# EAGLE board mynsys (EAGLE 9.6.2)
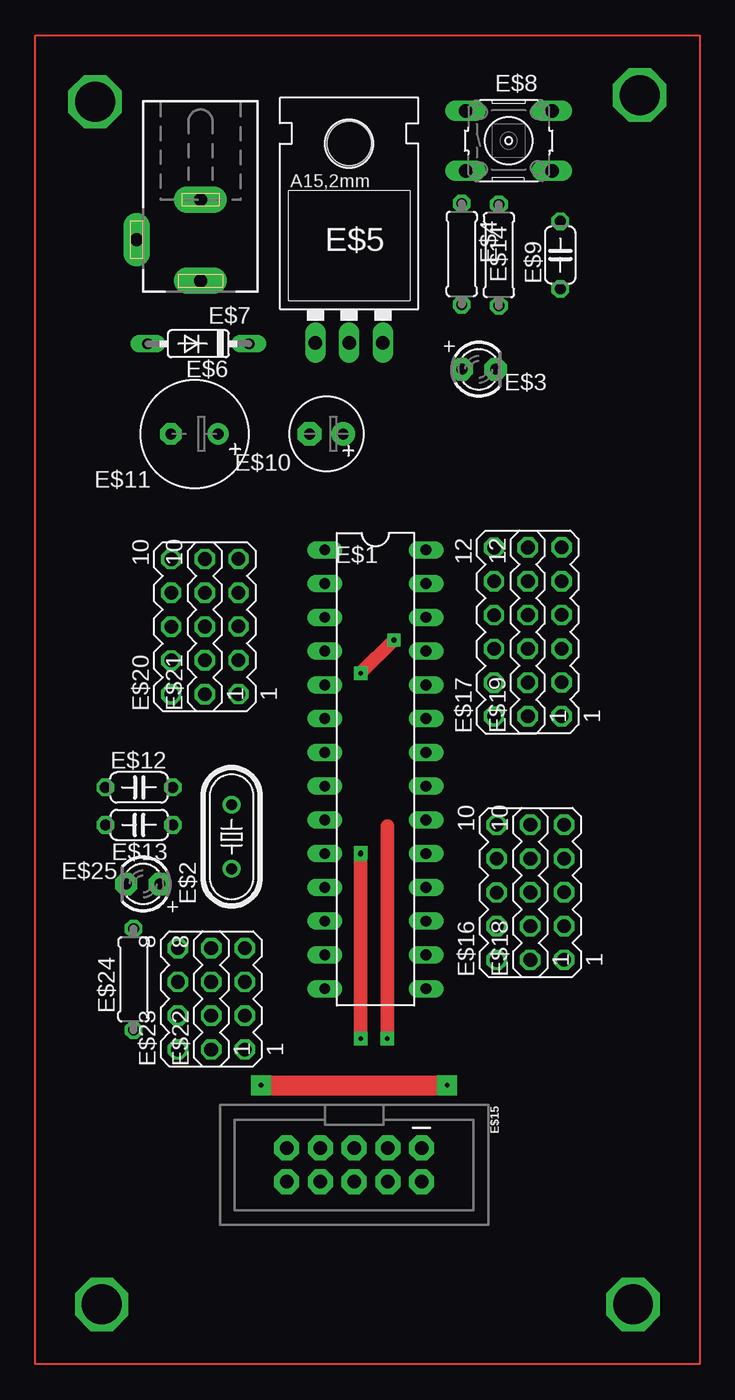
[diagram p0: board, top side]
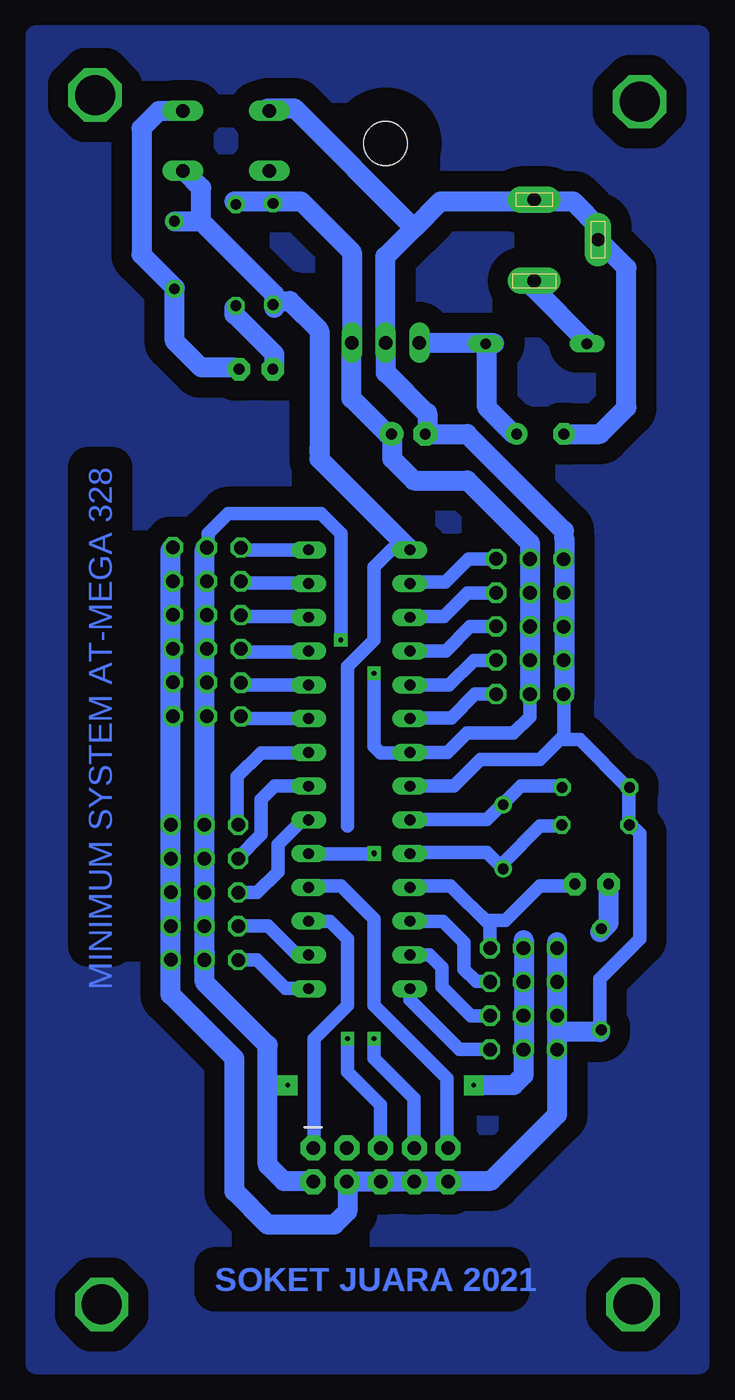
[diagram p1: board, bottom side, seen from below]

No outline drawn. Coordinates in mm, seen from the top.
Copper layers (1*16): Top 0.035mm / dielectric 1.5mm / Bottom 0.035mm
Design rules "default *": minimum track width 6mil, minimum drill 0.35mm, track to track 60mil, track to pad 60mil, pad to pad 6mil, via to via 6mil, smd to smd 6mil, copper to edge 40mil, drill to drill 6mil, minimum pad ring 10mil, minimum via ring 8mil, stop-mask expansion 4mil, vias tented up to drill 0mil, thermal gap 10mil

## Footprints (pad centres in the part's own frame; a part is rotated, then mirrored left to right if it is on the bottom)
DIL28-3 = drill 0.813 long: 1 -16.51,-3.81; 2 -13.97,-3.81; 3 -11.43,-3.81; 4 -8.89,-3.81; 5 -6.35,-3.81; 6 -3.81,-3.81; 7 -1.27,-3.81; 8 1.27,-3.81; 9 3.81,-3.81; 10 6.35,-3.81; 11 8.89,-3.81; 12 11.43,-3.81; 13 13.97,-3.81; 14 16.51,-3.81; 15 16.51,3.81; 16 13.97,3.81; 17 11.43,3.81; 18 8.89,3.81; 19 6.35,3.81; 20 3.81,3.81; 21 1.27,3.81; 22 -1.27,3.81; 23 -3.81,3.81; 24 -6.35,3.81; 25 -8.89,3.81; 26 -11.43,3.81; 27 -13.97,3.81; 28 -16.51,3.81
HC49/S = drill 0.813: 1 -2.413,0; 2 2.413,0
LED3MM = drill 0.813 pad 1.676 octagon: A -1.27,0; K 1.27,0
0207/7 = drill 0.813 octagon: 1 -3.81,0; 2 3.81,0
78XXL = drill 1.016 long: GND 0,-3.81; IN -2.54,-3.81; OUT 2.54,-3.81 | hole 3.302: 0,11.176
DO35-7 = drill 0.813 long: A 3.81,0; C -3.81,0
DCJ0202 = drill 1 pad 2 long: 1 0,3.1; 2 4.8,0; 3 0,-3
B3F-10XX = drill 1.016 long: 1 -3.251,2.261; 2 3.251,2.261; 3 -3.251,-2.261; 4 3.251,-2.261
C050-024X044 = drill 0.813 octagon: 1 -2.54,0; 2 2.54,0
E2,5-6 = drill 0.813 pad 1.778: + -1.27,0 | drill 0.813 pad 1.778 octagon: - 1.27,0
E3,5-8 = drill 0.813 pad 1.6: + -1.778,0 | drill 0.813 pad 1.6 octagon: - 1.778,0
2X5-SHROUDED-NS = drill 1.016 pad 1.88 octagon: 1 -1.27,5.08; 2 1.27,5.08; 3 -1.27,2.54; 4 1.27,2.54; 5 -1.27,0; 6 1.27,0; 7 -1.27,-2.54; 8 1.27,-2.54; 9 -1.27,-5.08; 10 1.27,-5.08
MA05-2 = drill 1.016 octagon: 1 -5.08,-1.27; 2 -5.08,1.27; 3 -2.54,-1.27; 4 -2.54,1.27; 5 0,-1.27; 6 0,1.27; 7 2.54,-1.27; 8 2.54,1.27; 9 5.08,-1.27; 10 5.08,1.27
MA06-2 = drill 1.016 octagon: 1 -6.35,-1.27; 2 -6.35,1.27; 3 -3.81,-1.27; 4 -3.81,1.27; 5 -1.27,-1.27; 6 -1.27,1.27; 7 1.27,-1.27; 8 1.27,1.27; 9 3.81,-1.27; 10 3.81,1.27; 11 6.35,-1.27; 12 6.35,1.27
MA04-2 = drill 1.016 octagon: 1 -3.81,-1.27; 2 -3.81,1.27; 3 -1.27,-1.27; 4 -1.27,1.27; 5 1.27,-1.27; 6 1.27,1.27; 7 3.81,-1.27; 8 3.81,1.27

## Placement (x,y rotation side)
E$1  [DIL28-3]  125.61,44.77 270 top
E$2  [HC49/S]  114.78,39.69 90 top
E$3  [LED3MM]  133.39,74.87 0 top
E$4  [0207/7]  132.1,83.54 270 top
E$5  [78XXL]  123.63,80.68 0 top
E$6  [DO35-7]  112.28,76.78 180 top
E$7  [DCJ0202]  112.44,84.62 180 top
E$8  [B3F-10XX]  135.64,92.06 0 top
E$9  [C050-024X044]  139.52,83.46 90 top
E$10  [E2,5-6]  121.92,70 180 top
E$11  [E3,5-8]  111.99,70 180 top
E$12  [C050-024X044]  107.81,43.4 0 top
E$13  [C050-024X044]  107.83,40.58 180 top
E$14  [0207/7]  134.9,83.46 90 top
E$15  [2X5-SHROUDED-NS]  124,15 270 top
E$16  [MA05-2]  136,35.5 90 top
E$17  [MA06-2]  135.8,55.1 90 top
E$18  [MA05-2]  138.53,35.51 90 top
E$19  [MA06-2]  138.36,55.11 90 top
E$20  [MA05-2]  111.5,55.5 90 top
E$21  [MA05-2]  114.03,55.51 90 top
E$22  [MA04-2]  114.5,27.5 90 top
E$23  [MA04-2]  112,27.5 90 top
E$24  [0207/7]  107.4,28.96 90 top
E$25  [LED3MM]  108.11,36.13 180 top

## Library data of the parts
E$1 = ic-package
E$2-E$4 E$9-E$14 E$24 E$25 = adafruit
E$5 = v-reg
E$6 = diode
E$7 = con-jack
E$8 = switch-omron
E$15 = SparkFun-Connectors
E$16-E$23 = con-lstb

## Tracks (layer width: path | path; a pad name or v marks a point on that pad's centre or on a via)
PLG
  pour Bottom: 100,100 150,100 150,0 100,0
S$1
  Top 0.152: 100,100 150,100 150,0 100,0 100,100
S$2
  Bottom 1.5: 112.5,81.5 112.5,81 108.5,77
S$3
  Bottom 1.5: 114,70 116,72 116,76.5
S$4
  Bottom 1.5: 115.45,76.82 120.93,76.82 120.96,76.79
S$5
  Bottom 1: 126.5,40.5 126.5,52.5 124.5,54.5 124.5,60 123.2,61.3 121.91,61.3
S$6
  Bottom 1.5: 110,70 107.5,70 105.5,72 105.5,82.5 107.5,84.5 107.5,85.5 109.5,87.5 119.5,87.5 121.5,85.5 | 123.65,76.87 123.65,83.35 121.5,85.5 | 132.5,94.5 130.5,94.5 121.5,85.5
S$7
  Bottom 1.5: 110.18,62.18 110.18,50.38 110.22,50.35
S$8
  Bottom 1.5: 112.75,61.75 112.75,50.41 112.8,50.36
S$9
  Bottom 1.5: 135,87.5 130,87.5 126.16,83.66 126.16,76.33
S$10
  Bottom 1.5: 132,75 132,76 135,79 135,79.5
S$11
  Bottom 1: 129,16 129,24.5 126.5,27 126.5,32 127.82,33.32 129.43,33.32
S$12
  Bottom 1.5: 138.87,94.29 140.71,94.29 142,93 142,83.5 139.5,81 139.5,77 137.5,75 135,75
S$13
  Bottom 1: 121.81,46.03 118.97,46.03 117.5,47.5 114,47.5 112.78,48.72 112.78,50.47
S$14  (via drill 0.35 pad 1)
  Top 1: v126.5,24.5 126.5,40.5
  Bottom 1: 124,16.5 124,19.5 126.5,22 v126.5,24.5
S$15  (via drill 0.35 pad 1)
  Top 1: v124.48,38.38 124.48,24.52 v124.5,24.5 v124.5,38.5
  Bottom 1: 121.5,16.5 121.5,20 124.5,23 v124.5,24.5 | v124.48,38.38 129.48,38.38
S$16
  Bottom 1: 122,41 116,41 115,42
S$17
  Bottom 1: 122,38.5 116,38.5 115,37.5
S$18
  Bottom 1: 107.5,25 107.5,29 104.5,32 104.5,39.93 105.32,40.75
  Bottom 1.5: 107.5,25 110.5,25
S$19
  Bottom 1.5: 107.5,32.5 106.83,33.17 106.83,36.19
S$21
  Bottom 1: 129.5,36 127,36 124.5,33.5 124.5,27 119,21.5 119,16.5
S$22
  Bottom 1: 121.85,58.88 119.12,58.88 117.41,60.59 115.33,60.59
S$23
  Bottom 1: 121.82,56.26 119.24,56.26 117.48,58.02 115.3,58.02
S$24
  Bottom 1: 122.3,53.68 119.08,53.68 117.27,55.49 115.3,55.49
S$25
  Bottom 1: 121.78,51.12 118.85,51.12 117,52.97 115.32,52.97
S$26
  Bottom 1: 121.82,48.63 118.69,48.63 116.9,50.42 115.29,50.42
S$27
  Bottom 1: 129.5,46 133,46 134.79,44.21 134.79,40.59
S$28
  Bottom 1: 129.5,43.5 132,43.5 133,42.5 133,39.86 134.75,38.12 134.75,37.96
S$29
  Bottom 1: 129.5,41 129.86,41 131.74,39.12 131.74,37.05 133.3,35.49 134.79,35.49
S$30
  Bottom 1: 129.41,30.76 130.26,30.76 132.46,32.96 134.74,32.96
S$31
  Bottom 1: 129.44,28.3 131.18,28.3 133.3,30.42 134.76,30.42
S$32
  Bottom 1: 129.41,61.26 134.42,61.26 134.57,61.42
S$33
  Bottom 1: 129.44,58.76 134.4,58.76 134.55,58.91
S$34
  Bottom 1: 129.41,56.27 134.44,56.27 134.53,56.35
S$35
  Bottom 1: 129.41,53.6 134.34,53.6 134.54,53.8
S$36
  Bottom 1: 129.44,51.12 134.46,51.12 134.59,51.25
S$37
  Bottom 1: 129.46,48.57 134.39,48.57 134.56,48.75
S$38
  Bottom 1.5: 137.24,30.41 137.24,61.31 137.06,61.49
S$39
  Bottom 1.5: 139.82,30.38 139.82,61.26 139.65,61.43
S$40
  Bottom 1.5: 139.51,89.79 138.79,89.79 137.5,88.5 137.5,86 | 139.5,86 137.5,86 | 137.5,86 132,80.5 132,80 | 132,79.5 132,80 | 132,80 130.85,80 128.61,77.76 128.61,68.61
S$41  (via drill 0.35 pad 1)
  Top 1: v124.5,52 v127,54.5
  Bottom 1: 122,46 124,46 124.5,46.5 v124.5,52 | v127,54.5 127,62.5 128.5,64 135.5,64 137,62.5 137,61.5
S$42
  Bottom 1: 122,36 118.73,36 115.78,33.05 115.78,31.33
S$43
  Bottom 1: 121.89,33.33 119.33,33.33 117.73,31.73 117.73,29.73 116.79,28.79 115.73,28.79
S$44
  Bottom 1: 121.75,30.79 120.32,30.79 119.4,29.87 119.4,28.4 117.21,26.21 115.77,26.21
S$45
  Bottom 1: 121.78,28.21 121.78,27.43 118.05,23.7 115.8,23.7
S$46
  Bottom 1.5: 110.73,31.77 110.73,31.17
S$47
  Bottom 1.5: 126.57,13.78 119.03,13.78 119,13.81 115.69,13.81 110.71,18.79 110.71,31.54
S$48  (via drill 0.35 pad 1.5)
  Top 1.5: v117,21 v131,21
  Bottom 1.5: 113.22,31.92 113.22,23.71 113.25,23.69 113.25,21.75 114,21 v117,21 | 129.09,13.77 131.27,13.77 132.5,15 132.5,21 | 132.5,21 132.5,24 137.25,28.75 137.25,30.97 | v131,21 132.5,21
S$49
  Bottom 1.5: 126.5,13.5 126.5,11.5 127.5,10.5 132.5,10.5 135,13 135,23 139.82,27.82 139.82,31.94
S$50
  Bottom 1.5: 123.61,77.27 123.61,74.61 120.5,71.5
S$51
  Bottom 1.5: 126.19,77.23 126.19,72.69 123.5,70
S$52
  Bottom 1.5: 128.61,68.92 128.61,68.11 122,61.5
S$53
  Bottom 1.5: 120.49,71.58 120.49,70.18 120.67,70 120.66,70 117.5,70 110.2,62.7
S$54
  Bottom 1.5: 123.13,70.01 123.13,68.13 121.5,66.5 117.48,66.5 112.78,61.79 112.78,60.72 112.76,60.71
S$55  (via drill 3 pad 4)
  other vias: 104.5,95
S$56  (via drill 3 pad 4)
  other vias: 145.5,95.5
S$57  (via drill 3 pad 4)
  other vias: 145,4.5
S$58  (via drill 3 pad 4)
  other vias: 105,4.5
S$59
  Bottom 1: 105.3,40.55 105.3,43.3 109,47 110.5,47 | 122,43.5 118.5,43.5 116.5,45.5 112,45.5 110.5,47 | 110.2,50.42 110.2,47.3 110.5,47
S$60
  Bottom 1: 110.5,43.5 113.44,43.5 114.8,42.14
S$61
  Bottom 1: 110.5,40.5 112,40.5 114.74,37.76 114.74,37.34
S$62
  Bottom 1: 109.5,36 112,36 114.61,33.39 116.09,33.39 116.89,34.19 116.91,34.19

## Text on the board
Bottom: MINIMUM SYSTEM AT-MEGA 328 | SOKET JUARA 2021